# EAGLE board Panel (EAGLE 8.2.1), part 1 of 2
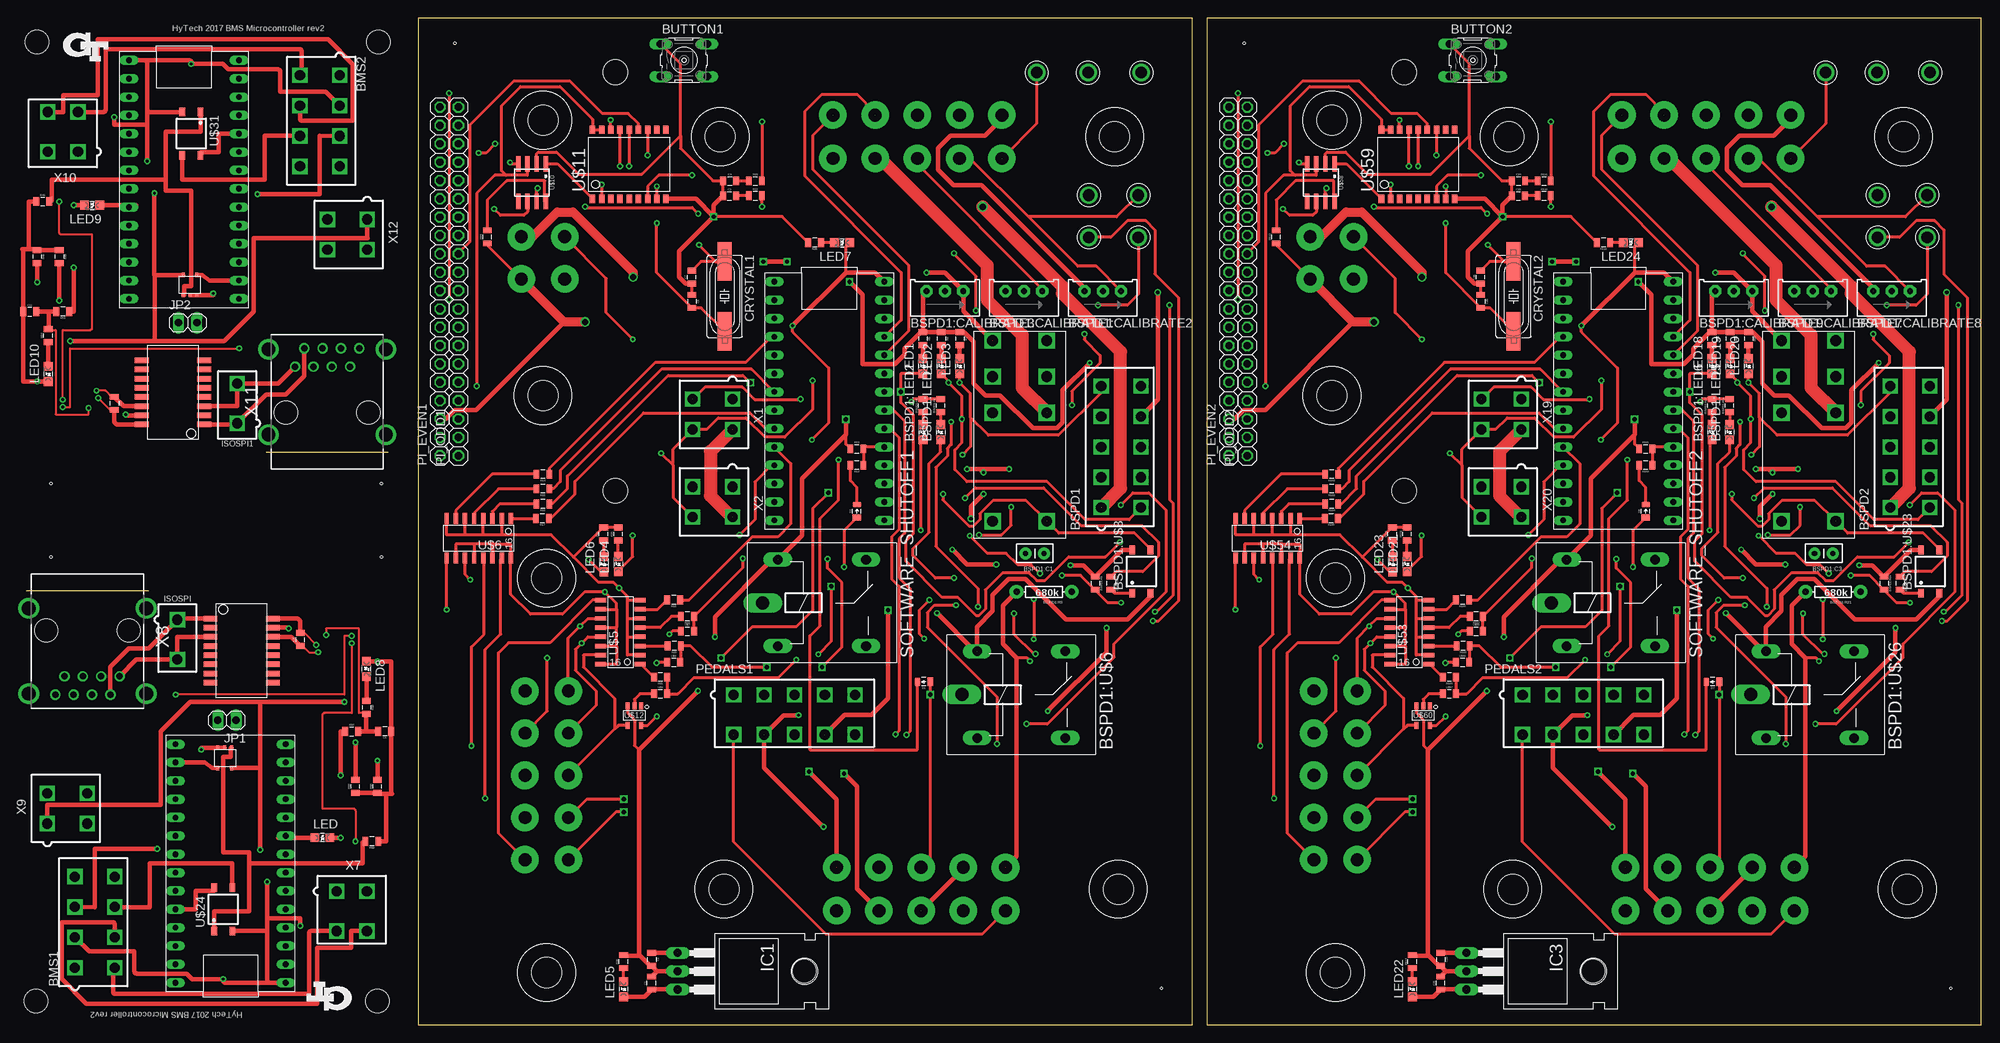
[diagram p0: board, top side]
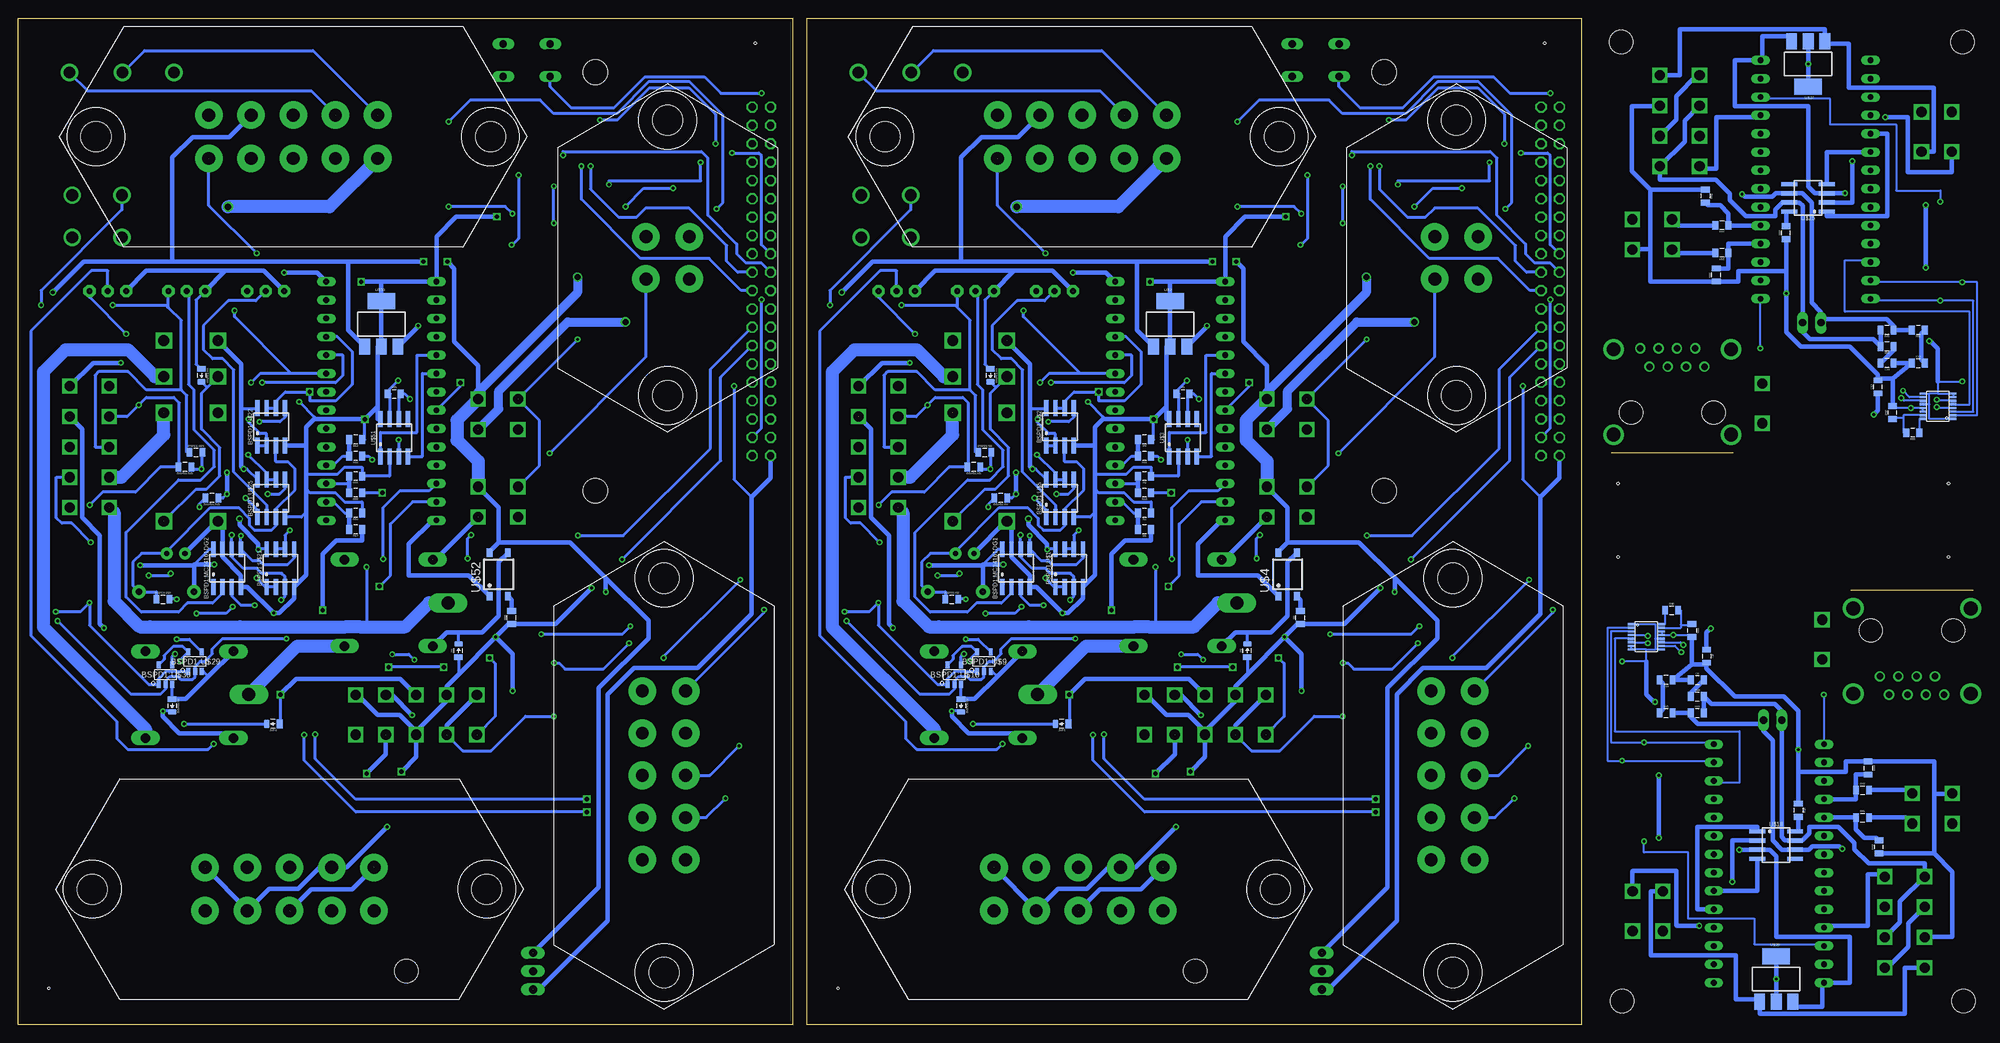
[diagram p1: board, bottom side, seen from below]

Size 270.55 x 139.37 mm. Coordinates in mm from the lower left corner, seen from the top.
Outline: 163.39,0 270.55,0 270.55,139.37 163.39,139.37 163.39,0
Outline: 54.22,0 161.38,0 161.38,139.37 54.22,139.37 54.22,0
Copper layers (1*16): Top 0.035mm / dielectric 1.5mm / Bottom 0.035mm
Design rules "default *": minimum track width 6mil, minimum drill 15mil, track to track 8mil, track to pad 8mil, pad to pad 8mil, via to via 8mil, smd to smd 8mil, copper to edge 40mil, drill to drill 8mil, minimum pad ring 10mil, minimum via ring 8mil, stop-mask expansion 4mil, vias tented up to drill 0mil, thermal gap 10mil
Holes 3.3 mm at 48.58,3.3 1.33,3.3 1.49,136.07 48.73,136.07
Holes 3.43 mm at 190.67,131.88 190.67,73.96 81.5,131.88 81.5,73.96
Holes 0.35 mm at 3.42,74.93 49.14,74.93 49.14,64.77 3.42,64.77 157.09,5.08 266.31,5.08 59.3,135.89 168.52,135.89
tKeepout: area 186.4,69.7 to 194.8,78.1; area 186.5,127.6 to 194.8,136; area 77.3,69.7 to 85.6,78.1; area 77.3,127.6 to 85.7,136

## Footprints (pad centres in the part's own frame; a part is rotated, then mirrored left to right if it is on the bottom)
MINIFIT_5566-8 = drill 1.4 square: 1 6.3,-2.75; 2 2.1,-2.75; 3 -2.1,-2.75; 4 -6.3,-2.75; 5 6.3,2.75; 6 2.1,2.75; 7 -2.1,2.75; 8 -6.3,2.75
MINIFIT_5566-10 = drill 1.4 square: 1 8.4,-2.75; 2 4.2,-2.75; 3 0,-2.75; 4 -4.2,-2.75; 5 -8.4,-2.75; 6 8.4,2.75; 7 4.2,2.75; 8 0,2.75; 9 -4.2,2.75; 10 -8.4,2.75
CAP-PTH-SMALLEZ = drill 0.7 pad 1.651: 1 0,0; 2 2.54,0
TRIMPOT_3296 = drill 0.813 pad 1.676 octagon: 1 2.54,1.27; 2 0,1.27; 3 -2.54,1.27
0805_D = smd 0.8 x 1.2: A -0.9,0; C 0.9,0
LED-805 = smd 1.2 x 1.2: A 0,-1.05; C 0,1.05
SOIC-08 = smd 0.6 x 2.2: 1 -1.905,-2.6; 2 -0.635,-2.6; 3 0.635,-2.6; 4 1.905,-2.6; 5 1.905,2.6; 6 0.635,2.6; 7 -0.635,2.6; 8 -1.905,2.6
0805 = smd 0.8 x 1.2: 1 -0.9,0; 2 0.9,0
AXIAL-0.3EZ = drill 0.9 pad 1.88: P$1 -3.81,0; P$2 3.81,0
SOP04 = smd 0.8 x 1.2: 1 -1.27,-3; 2 1.27,-3; 3 1.27,3; 4 -1.27,3
JW2SN = drill 1.5 square: 2 10.008,0; 3 5.004,0; 4 0,0; 5 0,7.493; 6 5.004,7.493; 7 10.008,7.493; COIL+ 25.019,0; COIL- 25.019,7.493
ZF112 = drill 1.321 long: 1 4.064,14.884; 2 4.064,2.896; O 16.256,14.884; S 16.256,2.896 | drill 1.803 long: P 1.956,8.89
TEST_POINT = drill 1.6: P$1 0,0
SOT-23-5 = smd 1 x 0.55: 1 -1.35,0.95; 2 -1.35,0; 3 -1.35,-0.95; 4 1.35,-0.95; 5 1.35,0.95
B3F-10XX = drill 1.016 long: 1 -3.251,2.261; 2 3.251,2.261; 3 -3.251,-2.261; 4 3.251,-2.261
HC49UP = smd 5.334 x 1.93: 1 -4.826,0; 2 4.826,0
TO-220-H = drill 1.118 long: 1 -2.54,-6.35; 2 0,-6.35; 3 2.54,-6.35 | hole 3.302: 0,11.176
MINIFIT_5566-2 = drill 1.4 square: 1 0,-2.75; 2 0,2.75
1X02 = drill 1.016 long: 1 -1.27,0; 2 1.27,0
1X20 = drill 1.016 octagon: 1 0,0; 2 2.54,0; 3 5.08,0; 4 7.62,0; 5 10.16,0; 6 12.7,0; 7 15.24,0; 8 17.78,0; 9 20.32,0; 10 22.86,0; 11 25.4,0; 12 27.94,0; 13 30.48,0; 14 33.02,0; 15 35.56,0; 16 38.1,0; 17 40.64,0; 18 43.18,0; 19 45.72,0; 20 48.26,0
TEENSY_3.2_SIMPLE = drill 0.8 long: 3.3V 16.51,29.21; A0 16.51,3.81; A1 16.51,6.35; A2 16.51,8.89; A3 16.51,11.43; A4 16.51,13.97; A5 16.51,16.51; A6 16.51,19.05; A7 16.51,21.59; A8 16.51,24.13; A9 16.51,26.67; AGND 16.51,31.75; D0(RX1) 1.27,31.75; D1(TX1) 1.27,29.21; D2 1.27,26.67; D3(CANTX) 1.27,24.13; D4(CANRX) 1.27,21.59; D5 1.27,19.05; D6 1.27,16.51; D7(RX3) 1.27,13.97; D8(TX3) 1.27,11.43; D9(RX2) 1.27,8.89; D10(TX2) 1.27,6.35; D11 1.27,3.81; D12 1.27,1.27; D13 16.51,1.27; GND 1.27,34.29; VIN 16.51,34.29
SOT223 = smd 1.5 x 2.235: 1 -2.3,-3.15; 2 0,-3.15; 3 2.3,-3.15 | smd 3.8 x 2.2: 4 0,3.15
SOIC-16 = smd 0.61 x 1.524: 1 -4.445,-2.794; 2 -3.175,-2.794; 3 -1.905,-2.794; 4 -0.635,-2.794; 5 0.635,-2.794; 6 1.905,-2.794; 7 3.175,-2.794; 8 4.445,-2.794; 9 4.445,2.667; 10 3.175,2.667; 11 1.905,2.667; 12 0.635,2.667; 13 -0.635,2.667; 14 -1.905,2.667; 15 -3.175,2.667; 16 -4.445,2.667
SOIC-18W = smd 0.762 x 1.143: 1 -5.08,-4.788; 2 -3.81,-4.788; 3 -2.54,-4.788; 4 -1.27,-4.788; 5 0,-4.788; 6 1.27,-4.788; 7 2.54,-4.788; 8 3.81,-4.788; 9 5.08,-4.788; 10 5.08,4.788; 11 3.81,4.788; 12 2.54,4.788; 13 1.27,4.788; 14 0,4.788; 15 -1.27,4.788; 16 -2.54,4.788; 17 -3.81,4.788; 18 -5.08,4.788
HX1188NL = smd 1.905 x 0.762: 1 -4.318,4.445; 2 -4.318,3.175; 3 -4.318,1.905; 4 -4.318,0.635; 5 -4.318,-0.635; 6 -4.318,-1.905; 7 -4.318,-3.175; 8 -4.318,-4.445; 9 4.318,-4.445; 10 4.318,-3.175; 11 4.318,-1.905; 12 4.318,-0.635; 13 4.318,0.635; 14 4.318,1.905; 15 4.318,3.175; 16 4.318,4.445
SOT23-5 = smd 0.61 x 0.406: EN -2.794,0; GND -2.794,0.94; VCC 0,1.905; WDI 0,0; WDO -2.794,1.905
MSOP-16 = smd 0.305 x 0.889: 1 -0.1,-0.5; 2 0.4,-0.5; 3 0.9,-0.5; 4 1.4,-0.5; 5 1.9,-0.5; 6 2.4,-0.5; 7 2.9,-0.5; 8 3.4,-0.5; 9 3.4,3.7; 10 2.9,3.7; 11 2.4,3.7; 12 1.9,3.7; 13 1.4,3.7; 14 0.9,3.7; 15 0.4,3.7; 16 -0.1,3.7
MINIFIT_5566-4 = drill 1.4 square: 1 2.1,-2.75; 2 -2.1,-2.75; 3 2.1,2.75; 4 -2.1,2.75
MX150L_VERTICAL-4 = drill 1.778 pad 3.81: 1 -2.921,2.997; 2 2.921,2.997; 3 -2.921,-2.997; 4 2.921,-2.997 | hole 4.191: -19.05,0; 19.05,0
MX150L_VERTICAL-10 = drill 1.778 pad 3.81: 1 -11.684,2.997; 2 -5.842,2.997; 3 0,2.997; 4 5.842,2.997; 5 11.684,2.997; 6 -11.684,-2.997; 7 -5.842,-2.997; 8 0,-2.997; 9 5.842,-2.997; 10 11.684,-2.997 | hole 4.191: -27.292,0; 27.292,0
RJ45-SHIELD1 = drill 0.9 pad 1.4: 1 -4.445,6.35; 2 -3.175,8.89; 3 -1.905,6.35; 4 -0.635,8.89; 5 0.635,6.35; 6 1.905,8.89; 7 3.175,6.35; 8 4.445,8.89 | drill 1.9 pad 2.5: S1 -8.128,-3.048; S2 8.128,-3.048; S3 -8.128,8.76; S4 8.128,8.76 | hole 3.251: -5.715,0; 5.715,0

## Placement (x,y rotation side)
BMS1  [MINIFIT_5566-8]  9.46,14.22 270 top
BMS2  [MINIFIT_5566-8]  40.6,125.15 90 top
BSPD1  MINIFIT_5566-10  [MINIFIT_5566-10]  151.5,80.01 270 top
BSPD1:C1  .47u  [CAP-PTH-SMALLEZ]  140.83,65.28 180 top
BSPD1:C3  .47u  [CAP-PTH-SMALLEZ]  250,65.28 180 top
BSPD1:CALIBRATE1  [TRIMPOT_3296]  138.04,100.33 0 top
BSPD1:CALIBRATE2  [TRIMPOT_3296]  148.96,100.33 0 top
BSPD1:CALIBRATE3  [TRIMPOT_3296]  127.11,100.33 0 top
BSPD1:CALIBRATE7  [TRIMPOT_3296]  247.21,100.33 0 top
BSPD1:CALIBRATE8  [TRIMPOT_3296]  258.13,100.33 0 top
BSPD1:CALIBRATE9  [TRIMPOT_3296]  236.28,100.33 0 top
BSPD1:D1  DIODE0805  [0805_D]  136,89.92 270 bottom
BSPD1:D2  DIODE0805  [0805_D]  140.07,44.2 270 bottom
BSPD1:D5  DIODE0805  [0805_D]  245.17,89.92 270 bottom
BSPD1:D6  DIODE0805  [0805_D]  249.24,44.2 270 bottom
BSPD1:LED1  [LED-805]  126.53,82.04 0 top
BSPD1:LED2  [LED-805]  124.09,82.04 0 top
BSPD1:LED5  [LED-805]  235.7,82.04 0 top
BSPD1:LED6  [LED-805]  233.26,82.04 0 top
BSPD1:MC34161DG1  [SOIC-08]  132.45,63.25 0 bottom
BSPD1:MC34161DG2  [SOIC-08]  241.62,63.25 0 bottom
BSPD1:R1  10k  [0805]  147.89,61.14 270 top
BSPD1:R2  330  [0805]  141.34,58.93 0 bottom
BSPD1:R3  680k  [AXIAL-0.3EZ]  140.83,59.94 180 top
BSPD1:R4  680  [0805]  150.1,61.14 270 top
BSPD1:R5  10k  [0805]  138.29,77.22 180 bottom
BSPD1:R6  10k  [0805]  136.77,79.25 0 bottom
BSPD1:R7  10k  [0805]  134.56,72.92 180 bottom
BSPD1:R8  330  [0805]  126.53,85.72 90 top
BSPD1:R9  330  [0805]  124.09,85.72 90 top
BSPD1:R19  10k  [0805]  257.06,61.14 270 top
BSPD1:R20  330  [0805]  250.51,58.93 0 bottom
BSPD1:R21  680k  [AXIAL-0.3EZ]  250,59.94 180 top
BSPD1:R22  680  [0805]  259.27,61.14 270 top
BSPD1:R23  10k  [0805]  247.46,77.22 180 bottom
BSPD1:R24  10k  [0805]  245.94,79.25 0 bottom
BSPD1:R25  10k  [0805]  243.73,72.92 180 bottom
BSPD1:R26  330  [0805]  235.7,85.72 90 top
BSPD1:R27  330  [0805]  233.26,85.72 90 top
BSPD1:U$1  MCP6002SOIC  [SOIC-08]  125.08,63.25 0 bottom
BSPD1:U$2  MCP6002SOIC  [SOIC-08]  126.35,82.8 0 bottom
BSPD1:U$3  CPC1002N  [SOP04]  154.29,62.74 0 top
BSPD1:U$4  JW2SN-DC5V  [JW2SN]  133.72,94.74 270 top
BSPD1:U$5  MCP6002SOIC  [SOIC-08]  126.35,72.9 0 bottom
BSPD1:U$6  G5LE  [ZF112]  127.5,36.83 0 top
BSPD1:U$7  TEST_POINT  [TEST_POINT]  147.03,114.86 0 top
BSPD1:U$8  TEST_POINT  [TEST_POINT]  147.03,109.02 0 top
BSPD1:U$9  SN74AHC1G09  [SOT-23-5]  136.89,50.29 90 bottom
BSPD1:U$10  SN74LVC1G08  [SOT-23-5]  140.98,48.49 90 bottom
BSPD1:U$21  MCP6002SOIC  [SOIC-08]  234.25,63.25 0 bottom
BSPD1:U$22  MCP6002SOIC  [SOIC-08]  235.52,82.8 0 bottom
BSPD1:U$23  CPC1002N  [SOP04]  263.46,62.74 0 top
BSPD1:U$24  JW2SN-DC5V  [JW2SN]  242.89,94.74 270 top
BSPD1:U$25  MCP6002SOIC  [SOIC-08]  235.52,72.9 0 bottom
BSPD1:U$26  G5LE  [ZF112]  236.66,36.83 0 top
BSPD1:U$27  TEST_POINT  [TEST_POINT]  256.2,114.86 0 top
BSPD1:U$28  TEST_POINT  [TEST_POINT]  256.2,109.02 0 top
BSPD1:U$29  SN74AHC1G09  [SOT-23-5]  246.06,50.29 90 bottom
BSPD1:U$30  SN74LVC1G08  [SOT-23-5]  250.15,48.49 90 bottom
BSPD2  MINIFIT_5566-10  [MINIFIT_5566-10]  260.67,80.01 270 top
BUTTON1  [B3F-10XX]  91,133.53 0 top
BUTTON2  [B3F-10XX]  200.16,133.53 0 top
C1  .1uF  [0805]  86.53,5.79 90 top
C2  .33uF  [0805]  86.53,9.07 270 top
C3  560pF  [0805]  97.29,114.76 0 top
C4  560pF  [0805]  97.32,116.84 0 top
C5  0.1uF  [0805]  49.59,40.64 180 top
C6  22pF  [0805]  92.09,100.15 270 top
C7  22pF  [0805]  92.09,103.5 90 top
C8  27pF  [0805]  36.89,51.05 270 bottom
C9  560pF  [0805]  38.16,47.75 0 bottom
C10  560pF  [0805]  42.48,47.75 180 bottom
C11  0.1uF  [0805]  0.47,98.73 0 top
C12  27pF  [0805]  13.17,88.32 90 bottom
C13  560pF  [0805]  11.9,91.62 180 bottom
C14  560pF  [0805]  7.58,91.62 0 bottom
C21  .1uF  [0805]  195.69,5.79 90 top
C22  .33uF  [0805]  195.69,9.07 270 top
C23  560pF  [0805]  206.46,114.76 0 top
C24  560pF  [0805]  206.49,116.84 0 top
C25  22pF  [0805]  201.26,100.15 270 top
C26  22pF  [0805]  201.26,103.5 90 top
CRYSTAL1  16MHz  [HC49UP]  96.63,100.84 270 top
CRYSTAL2  16MHz  [HC49UP]  205.8,100.84 270 top
D1  DIODE0805  [0805_D]  124.19,47.5 180 top
D2  DIODE0805  [0805_D]  114.92,71.12 90 top
D3  DIODE0805  [0805_D]  100.44,51.82 90 bottom
D7  DIODE0805  [0805_D]  233.36,47.5 180 top
D8  DIODE0805  [0805_D]  224.09,71.12 90 top
D9  DIODE0805  [0805_D]  209.61,51.82 90 bottom
IC1  [TO-220-H]  96.48,7.44 270 top
IC3  [TO-220-H]  205.65,7.44 270 top
ISOSPI  CONNECTOR-2  [MINIFIT_5566-2]  20.89,53.34 180 top
ISOSPI1  CONNECTOR-2  [MINIFIT_5566-2]  29.17,86.03 0 top
JMP1  DIODE0805  [0805_D]  126.1,41.66 180 bottom
JMP2  DIODE0805  [0805_D]  235.27,41.66 180 bottom
JP1  M02  [1X02]  27.75,42.16 180 top
JP2  M02  [1X02]  22.31,97.21 0 top
LED  [LED-805]  40.96,25.91 270 top
LED1  [LED-805]  124.07,91.19 0 top
LED2  [LED-805]  126.61,91.19 0 top
LED3  [LED-805]  129.15,91.19 0 top
LED4  [LED-805]  81.9,63.78 0 top
LED5  [LED-805]  82.64,4.95 0 top
LED6  [LED-805]  79.9,63.75 0 top
LED7  [LED-805]  112.89,108.28 90 top
LED8  [LED-805]  47.05,49.28 180 top
LED9  [LED-805]  9.11,113.46 90 top
LED10  [LED-805]  3.01,90.09 0 top
LED18  [LED-805]  233.24,91.19 0 top
LED19  [LED-805]  235.78,91.19 0 top
LED20  [LED-805]  238.32,91.19 0 top
LED21  [LED-805]  191.07,63.78 0 top
LED22  [LED-805]  191.81,4.95 0 top
LED23  [LED-805]  189.06,63.75 0 top
LED24  [LED-805]  222.06,108.28 90 top
PEDALS1  MINIFIT_5566-10  [MINIFIT_5566-10]  106.29,42.93 180 top
PEDALS2  MINIFIT_5566-10  [MINIFIT_5566-10]  215.46,42.93 180 top
PI_EVEN1  [1X20]  57.24,78.79 90 top
PI_EVEN2  [1X20]  166.41,78.79 90 top
PI_ODD1  [1X20]  59.78,78.79 90 top
PI_ODD2  [1X20]  168.95,78.79 90 top
R1  120  [0805]  109.33,87.38 0 bottom
R2  15k  [0805]  114.67,70.87 180 bottom
R3  15k  [0805]  114.67,75.95 180 bottom
R4  15k  [0805]  114.67,81.03 180 bottom
R5  150  [0805]  124.07,95 270 top
R6  150  [0805]  126.61,95 270 top
R7  150  [0805]  129.15,95 270 top
R8  100  [0805]  93.08,56.39 90 bottom
R9  10k  [0805]  114.67,68.58 180 bottom
R10  10k  [0805]  114.67,73.66 180 bottom
R11  10k  [0805]  114.67,78.74 180 bottom
R12  43k  [0805]  114.92,77.47 180 top
R13  12k  [0805]  114.92,79.76 0 top
R14  270  [0805]  71.46,76.23 180 top
R15  270  [0805]  71.46,74.19 180 top
R16  270  [0805]  71.46,72.11 180 top
R17  270  [0805]  71.41,70.1 180 top
R18  270  [0805]  89.57,58.83 180 top
R19  270  [0805]  91.48,56.54 180 top
R20  270  [0805]  89.65,52.45 180 top
R21  270  [0805]  87.74,48.13 180 top
R22  100  [0805]  100.88,114.78 0 top
R23  100  [0805]  100.88,116.84 0 top
R24  4.7k  [0805]  63.79,109.09 90 top
R25  150  [0805]  81.9,67.94 90 top
R26  150  [0805]  82.64,8.76 90 top
R27  150  [0805]  79.87,67.94 90 top
R28  150  [0805]  109.08,108.28 180 top
R29  120  [0805]  38.16,43.18 0 bottom
R30  2k  [0805]  48.58,33.02 90 top
R31  1k  [0805]  38.93,54.61 270 bottom
R32  2k  [0805]  45.53,33.02 90 top
R33  68  [0805]  47.82,25.4 180 top
R34  100  [0805]  38.16,45.47 0 bottom
R35  100  [0805]  42.48,43.18 0 bottom
R36  1k  [0805]  24.19,29.72 270 bottom
R37  [0805]  45.02,40.64 0 top
R38  [0805]  47.05,43.94 270 top
R39  120  [0805]  37.91,53.34 90 top
R40  1k  [0805]  41.72,57.4 0 bottom
R41  1k  [0805]  15.3,28.7 0 bottom
R42  1k  [0805]  15.3,32.51 0 bottom
R43  2k  [0805]  13.02,24.64 90 bottom
R44  2k  [0805]  14.54,35.56 270 bottom
R45  120  [0805]  11.9,96.19 180 bottom
R46  2k  [0805]  1.49,106.35 270 top
R47  1k  [0805]  11.14,84.76 90 bottom
R48  2k  [0805]  4.53,106.35 270 top
R49  68  [0805]  2.25,113.97 0 top
R50  100  [0805]  11.9,93.9 180 bottom
R51  100  [0805]  7.58,96.19 180 bottom
R52  1k  [0805]  25.87,109.65 90 bottom
R53  [0805]  5.04,98.73 180 top
R54  [0805]  3.01,95.43 90 top
R55  120  [0805]  12.15,86.03 270 top
R56  1k  [0805]  8.34,81.97 180 bottom
R57  1k  [0805]  34.76,110.67 180 bottom
R58  1k  [0805]  34.76,106.86 180 bottom
R59  2k  [0805]  37.05,114.73 270 bottom
R60  2k  [0805]  35.52,103.81 90 bottom
R89  120  [0805]  218.5,87.38 0 bottom
R90  15k  [0805]  223.84,70.87 180 bottom
R91  15k  [0805]  223.84,75.95 180 bottom
R92  15k  [0805]  223.84,81.03 180 bottom
R93  150  [0805]  233.24,95 270 top
R94  150  [0805]  235.78,95 270 top
R95  150  [0805]  238.32,95 270 top
R96  100  [0805]  202.25,56.39 90 bottom
R97  10k  [0805]  223.84,68.58 180 bottom
R98  10k  [0805]  223.84,73.66 180 bottom
R99  10k  [0805]  223.84,78.74 180 bottom
R100  43k  [0805]  224.09,77.47 180 top
R101  12k  [0805]  224.09,79.76 0 top
R102  270  [0805]  180.63,76.23 180 top
R103  270  [0805]  180.63,74.19 180 top
R104  270  [0805]  180.63,72.11 180 top
R105  270  [0805]  180.58,70.1 180 top
R106  270  [0805]  198.74,58.83 180 top
R107  270  [0805]  200.65,56.54 180 top
R108  270  [0805]  198.82,52.45 180 top
R109  270  [0805]  196.91,48.13 180 top
R110  100  [0805]  210.05,114.78 0 top
R111  100  [0805]  210.05,116.84 0 top
R112  4.7k  [0805]  172.96,109.09 90 top
R113  150  [0805]  191.07,67.94 90 top
R114  150  [0805]  191.81,8.76 90 top
R115  150  [0805]  189.04,67.94 90 top
R116  150  [0805]  218.25,108.28 180 top
SOFTWARE_SHUTOFF1  G5LE  [ZF112]  99.94,49.53 0 top
SOFTWARE_SHUTOFF2  G5LE  [ZF112]  209.11,49.53 0 top
U$1  TEENSY_3.2_SIMPLE  [TEENSY_3.2_SIMPLE]  102.22,68.58 0 top
U$2  [SOT223]  111.11,97.03 0 bottom
U$3  MCP2551  [SOIC-08]  109.33,81.28 0 bottom
U$4  CPC1002N  [SOP04]  94.86,62.36 0 bottom
U$5  TLP291-4  [SOIC-16]  82.16,54.36 90 top
U$6  TLP291-4  [SOIC-16]  62.6,67.31 180 top
U$7  JUMPER  [0805]  91.48,54.51 0 top
U$8  JUMPER  [0805]  89.57,50.19 0 top
U$9  JUMPER  [0805]  87.74,45.85 0 top
U$10  MCP2551  [SOIC-08]  69.96,116.59 180 top
U$11  MCP2515SMD  [SOIC-18W]  83.43,119.13 0 top
U$12  SN74LV1T34  [SOT-23-5]  84.14,42.82 270 top
U$13  TEST_POINT  [TEST_POINT]  153.89,114.86 0 top
U$14  TEST_POINT  [TEST_POINT]  153.89,109.02 0 top
U$15  TEST_POINT  [TEST_POINT]  139.81,131.83 0 top
U$16  TEST_POINT  [TEST_POINT]  146.93,131.83 0 top
U$17  TEST_POINT  [TEST_POINT]  154.29,131.83 0 top
U$18  MCP2551  [SOIC-08]  27.24,24.89 270 bottom
U$19  HX1188NLHX1188NL  [HX1188NL]  29.78,51.82 0 top
U$20  [SOT223]  27.24,6.35 0 bottom
U$21  STWD100  [SOT23-5]  26.48,35.56 270 top
U$22  LTC6820  [MSOP-16]  46.8,55.37 270 bottom
U$23  TEENSY_3.2_SIMPLE  [TEENSY_3.2_SIMPLE]  37.15,40.13 180 top
U$24  CPC1002N  [SOP04]  27.24,16 0 top
U$25  MCP2551  [SOIC-08]  22.82,114.48 90 bottom
U$26  HX1188NLHX1188NL  [HX1188NL]  20.28,87.55 180 top
U$27  [SOT223]  22.82,133.02 180 bottom
U$28  STWD100  [SOT23-5]  23.58,103.81 90 top
U$29  LTC6820  [MSOP-16]  3.26,84 90 bottom
U$30  TEENSY_3.2_SIMPLE  [TEENSY_3.2_SIMPLE]  12.92,99.24 0 top
U$31  CPC1002N  [SOP04]  22.82,123.37 180 top
U$49  TEENSY_3.2_SIMPLE  [TEENSY_3.2_SIMPLE]  211.39,68.58 0 top
U$50  [SOT223]  220.28,97.03 0 bottom
U$51  MCP2551  [SOIC-08]  218.5,81.28 0 bottom
U$52  CPC1002N  [SOP04]  204.03,62.36 0 bottom
U$53  TLP291-4  [SOIC-16]  191.33,54.36 90 top
U$54  TLP291-4  [SOIC-16]  171.77,67.31 180 top
U$55  JUMPER  [0805]  200.65,54.51 0 top
U$56  JUMPER  [0805]  198.74,50.19 0 top
U$57  JUMPER  [0805]  196.91,45.85 0 top
U$58  MCP2551  [SOIC-08]  179.13,116.59 180 top
U$59  MCP2515SMD  [SOIC-18W]  192.6,119.13 0 top
U$60  SN74LV1T34  [SOT-23-5]  193.31,42.82 270 top
U$61  TEST_POINT  [TEST_POINT]  263.06,114.86 0 top
U$62  TEST_POINT  [TEST_POINT]  263.06,109.02 0 top
U$63  TEST_POINT  [TEST_POINT]  248.98,131.83 0 top
U$64  TEST_POINT  [TEST_POINT]  256.1,131.83 0 top
U$65  TEST_POINT  [TEST_POINT]  263.46,131.83 0 top
X1  MINIFIT_5566-4  [MINIFIT_5566-4]  94.96,84.51 90 top
X2  MINIFIT_5566-4  [MINIFIT_5566-4]  94.96,72.39 90 top
X3  CONNECTOR-4MX150L_VERTICAL-4  [MX150L_VERTICAL-4]  71.49,106.17 270 bottom
X4  CONNECTOR-10MX150L_VERTICAL-10  [MX150L_VERTICAL-10]  123.81,18.8 0 bottom
X5  CONNECTOR-10MX150L_VERTICAL-10  [MX150L_VERTICAL-10]  123.3,122.94 180 bottom
X6  CONNECTOR-10MX150L_VERTICAL-10  [MX150L_VERTICAL-10]  72,34.54 270 bottom
X7  CONNECTOR-4  [MINIFIT_5566-4]  45.02,15.75 180 top
X8  RJ45-6L21-B  [RJ45-SHIELD1]  8.45,54.61 180 top
X9  CONNECTOR-4  [MINIFIT_5566-4]  5.65,29.97 270 top
X10  CONNECTOR-4  [MINIFIT_5566-4]  5.04,123.62 0 top
X11  RJ45-6L21-B  [RJ45-SHIELD1]  41.62,84.76 0 top
X12  CONNECTOR-4  [MINIFIT_5566-4]  44.41,109.4 90 top
X19  MINIFIT_5566-4  [MINIFIT_5566-4]  204.13,84.51 90 top
X20  MINIFIT_5566-4  [MINIFIT_5566-4]  204.13,72.39 90 top
X21  CONNECTOR-4MX150L_VERTICAL-4  [MX150L_VERTICAL-4]  180.66,106.17 270 bottom
X22  CONNECTOR-10MX150L_VERTICAL-10  [MX150L_VERTICAL-10]  232.98,18.8 0 bottom
X23  CONNECTOR-10MX150L_VERTICAL-10  [MX150L_VERTICAL-10]  232.47,122.94 180 bottom
X24  CONNECTOR-10MX150L_VERTICAL-10  [MX150L_VERTICAL-10]  181.17,34.54 270 bottom

## Library data of the parts
BMS1 BMS2 BSPD1 BSPD2 PEDALS1 PEDALS2 X1 X2 X7 X9 X10 X12 X19 X20 = HyTechDevices; OC_FARNELL: unknown; OC_NEWARK: unknown
BSPD1:C1 BSPD1:C3 BSPD1:CALIBRATE1-BSPD1:CALIBRATE3 BSPD1:CALIBRATE7-BSPD1:CALIBRATE9 BSPD1:D1 BSPD1:D2 BSPD1:D5 BSPD1:D6 BSPD1:LED1 BSPD1:LED2 BSPD1:LED5 BSPD1:LED6 BSPD1:MC34161DG1 BSPD1:MC34161DG2 BSPD1:R1-BSPD1:R9 BSPD1:R19-BSPD1:R27 BSPD1:U$1-BSPD1:U$10 BSPD1:U$21-BSPD1:U$30 C1-C14 C21-C26 D1-D3 D7-D9 IC1 IC3 JMP1 JMP2 JP1 JP2 LED LED1-LED10 LED18-LED24 PI_EVEN1 PI_EVEN2 PI_ODD1 PI_ODD2 R1-R60 R89-R116 SOFTWARE_SHUTOFF1 SOFTWARE_SHUTOFF2 U$1-U$31 U$49-U$65 X3-X6 X21-X24 = HyTechDevices
BUTTON1 BUTTON2 = HyTechDevices; MPN: B3F-1000; OC_FARNELL: 176432; OC_NEWARK: 36M3542
CRYSTAL1 CRYSTAL2 = SparkFun-FreqCtrl
ISOSPI ISOSPI1 = HyTechDevices; OC_FARNELL: 1822072; OC_NEWARK: unknown
X8 X11 = con-tycoelectronics; OC_FARNELL: unknown; OC_NEWARK: unknown

## Nets
12V_SUPPLY: BMS1.1 U$20.1 X7.1
12V_SUPPLY1: BMS2.1 U$27.1 X10.1
+5V1: C5.1 LED8.A R30.1 R32.1 R33.1 U$18.3 U$20.3 U$21.VCC U$22.1 U$22.7 U$22.8 U$22.9 U$22.12 U$23.VIN X9.1
+5V2: C11.1 LED10.A R46.1 R48.1 R49.1 U$25.3 U$27.3 U$28.VCC U$29.1 U$29.7 U$29.8 U$29.9 U$29.12 U$30.VIN X12.1
+5V3: BSPD1:CALIBRATE3.1 BSPD1:MC34161DG1.8 BSPD1:R1.1 BSPD1:R3.P$2 BSPD1:R5.1 BSPD1:R6.2 BSPD1:R7.1 BSPD1:U$1.8 BSPD1:U$2.8 BSPD1:U$3.4 BSPD1:U$4.4 BSPD1:U$5.8 BSPD1:U$9.5 BSPD1:U$10.5 LED7.A PEDALS1.1 PEDALS1.4 PEDALS1.7 U$1.VIN U$2.3 U$3.3 U$12.5 X4.1 X4.4 X4.7
+5V4: BSPD1:CALIBRATE9.1 BSPD1:MC34161DG2.8 BSPD1:R19.1 BSPD1:R21.P$2 BSPD1:R23.1 BSPD1:R24.2 BSPD1:R25.1 BSPD1:U$21.8 BSPD1:U$22.8 BSPD1:U$23.4 BSPD1:U$24.4 BSPD1:U$25.8 BSPD1:U$29.5 BSPD1:U$30.5 LED24.A PEDALS2.1 PEDALS2.4 PEDALS2.7 U$49.VIN U$50.3 U$51.3 U$60.5 X22.1 X22.4 X22.7
+5V/1: C1.1 IC1.3 LED5.A PI_EVEN1.1 U$10.3 U$11.17 U$11.18
+5V/3: C21.1 IC3.3 LED22.A PI_EVEN2.1 U$58.3 U$59.17 U$59.18
+12V1: BSPD1.9 BSPD1:D2.C BSPD1:U$6.2 C2.1 IC1.1 U$2.1 U$4.4 U$5.10 U$5.12 U$5.14 U$5.16 U$6.10 U$6.12 U$6.14 U$6.16 X1.1 X2.1 X3.1 X5.9
+12V2: BSPD1:D6.C BSPD1:U$26.2 BSPD2.9 C22.1 IC3.1 U$50.1 U$52.4 U$53.10 U$53.12 U$53.14 U$53.16 U$54.10 U$54.12 U$54.14 U$54.16 X19.1 X20.1 X21.1 X23.9
BSPD1:N$1: BSPD1:CALIBRATE2.2 BSPD1:MC34161DG1.3
BSPD1:N$2: BSPD1:CALIBRATE1.2 BSPD1:MC34161DG1.2
BSPD1:N$3: BSPD1:R4.1 BSPD1:U$5.1
BSPD1:N$4: BSPD1:C1.1 BSPD1:R2.1 BSPD1:R3.P$1 BSPD1:U$2.3 BSPD1:U$5.3
BSPD1:N$5: BSPD1:CALIBRATE3.2 BSPD1:U$5.2
BSPD1:N$6: BSPD1:D1.C BSPD1:U$3.3 BSPD1:U$4.3 BSPD1:U$4.COIL- BSPD1:U$5.5
BSPD1:N$7: BSPD1:U$2.5 BSPD1:U$10.4
BSPD1:N$8: BSPD1:R2.2 BSPD1:U$9.4
BSPD1:N$9: BSPD1:R4.2 BSPD1:U$3.1
BSPD1:N$10: BSPD1:LED2.A BSPD1:U$1.6 BSPD1:U$1.7
BSPD1:N$11: BSPD1:MC34161DG1.5 BSPD1:R1.2 BSPD1:U$1.5 BSPD1:U$7.P$1 BSPD1:U$9.1 BSPD1:U$10.1
BSPD1:N$12: BSPD1:MC34161DG1.6 BSPD1:R7.2 BSPD1:U$1.3 BSPD1:U$8.P$1 BSPD1:U$9.2 BSPD1:U$10.2
BSPD1:N$13: BSPD1:LED1.A BSPD1:U$1.1 BSPD1:U$1.2
BSPD1:N$14: BSPD1:LED2.C BSPD1:R9.1
BSPD1:N$15: BSPD1:LED1.C BSPD1:R8.1
BSPD1:N$31: BSPD1:CALIBRATE8.2 BSPD1:MC34161DG2.3
BSPD1:N$32: BSPD1:CALIBRATE7.2 BSPD1:MC34161DG2.2
BSPD1:N$33: BSPD1:R22.1 BSPD1:U$25.1
BSPD1:N$34: BSPD1:C3.1 BSPD1:R20.1 BSPD1:R21.P$1 BSPD1:U$22.3 BSPD1:U$25.3
BSPD1:N$35: BSPD1:CALIBRATE9.2 BSPD1:U$25.2
BSPD1:N$36: BSPD1:D5.C BSPD1:U$23.3 BSPD1:U$24.3 BSPD1:U$24.COIL- BSPD1:U$25.5
BSPD1:N$37: BSPD1:U$22.5 BSPD1:U$30.4
BSPD1:N$38: BSPD1:R20.2 BSPD1:U$29.4
BSPD1:N$39: BSPD1:R22.2 BSPD1:U$23.1
BSPD1:N$40: BSPD1:LED6.A BSPD1:U$21.6 BSPD1:U$21.7
BSPD1:N$41: BSPD1:MC34161DG2.5 BSPD1:R19.2 BSPD1:U$21.5 BSPD1:U$27.P$1 BSPD1:U$29.1 BSPD1:U$30.1
BSPD1:N$42: BSPD1:MC34161DG2.6 BSPD1:R25.2 BSPD1:U$21.3 BSPD1:U$28.P$1 BSPD1:U$29.2 BSPD1:U$30.2
BSPD1:N$43: BSPD1:LED5.A BSPD1:U$21.1 BSPD1:U$21.2
BSPD1:N$44: BSPD1:LED6.C BSPD1:R27.1
BSPD1:N$45: BSPD1:LED5.C BSPD1:R26.1
BSPD1:SHUTDOWN_C1: BSPD1:U$4.6 BSPD1:U$6.S
BSPD1:SHUTDOWN_C2: BSPD1:U$24.6 BSPD1:U$26.S
BUT1: BUTTON1.3 PI_ODD1.2
BUT2: BUTTON2.3 PI_ODD2.2
CAN-H1: R22.2 U$10.7
CAN-H2: R110.2 U$58.7
CAN-L1: R23.2 U$10.6
CAN-L2: R111.2 U$58.6
CANH: BMS1.4 BMS1.6 JP1.2 R29.2 R34.2 U$18.7 X7.4
CANH1: BMS2.4 BMS2.6 JP2.2 R45.2 R50.2 U$25.7 X10.4
CANL: BMS1.3 BMS1.5 JP1.1 R29.1 R35.2 U$18.6 X7.3
CANL1: BMS2.3 BMS2.5 JP2.1 R45.1 R51.2 U$25.6 X10.3
CS1: PI_EVEN1.12 U$11.16
CS2: PI_EVEN2.12 U$59.16
GND1: BMS1.2 C5.2 C8.2 C9.1 C10.1 R31.2 R36.1 R37.2 R38.2 R43.1 R44.1 U$18.2 U$20.2 U$20.4 U$21.EN U$21.GND U$22.13 U$22.14 U$23.GND U$24.2 X7.2 X9.2
GND2: BMS2.2 C11.2 C12.2 C13.1 C14.1 R47.2 R52.1 R53.2 R54.2 R59.1 R60.1 U$25.2 U$27.2 U$27.4 U$28.EN U$28.GND U$29.13 U$29.14 U$30.GND U$31.2 X10.2 X12.2
GND3: BSPD1.10 BSPD1:C1.2 BSPD1:CALIBRATE1.3 BSPD1:CALIBRATE2.3 BSPD1:CALIBRATE3.3 BSPD1:D1.A BSPD1:D2.A BSPD1:MC34161DG1.4 BSPD1:MC34161DG1.7 BSPD1:R8.2 BSPD1:R9.2 BSPD1:U$1.4 BSPD1:U$2.4 BSPD1:U$3.2 BSPD1:U$4.COIL+ BSPD1:U$5.4 BSPD1:U$6.1 BSPD1:U$9.3 BSPD1:U$10.3 BUTTON1.1 C1.2 C2.2 C3.1 C4.1 C6.1 C7.1 D3.A IC1.2 PEDALS1.2 PEDALS1.5 PEDALS1.8 PI_EVEN1.3 R2.1 R3.1 R4.1 R5.1 R6.1 R7.1 R8.1 R13.1 R24.1 R25.2 R26.2 R27.2 R28.2 SOFTWARE_SHUTOFF1.1 U$1.GND U$2.2 U$2.4 U$3.2 U$3.8 U$5.2 U$5.4 U$5.6 U$5.8 U$6.2 U$6.4 U$6.6 U$6.8 U$10.2 U$11.9 U$12.3 X1.2 X2.2 X3.2 X4.2 X4.5 X4.8 X5.10
GND4: BSPD1:C3.2 BSPD1:CALIBRATE7.3 BSPD1:CALIBRATE8.3 BSPD1:CALIBRATE9.3 BSPD1:D5.A BSPD1:D6.A BSPD1:MC34161DG2.4 BSPD1:MC34161DG2.7 BSPD1:R26.2 BSPD1:R27.2 BSPD1:U$21.4 BSPD1:U$22.4 BSPD1:U$23.2 BSPD1:U$24.COIL+ BSPD1:U$25.4 BSPD1:U$26.1 BSPD1:U$29.3 BSPD1:U$30.3 BSPD2.10 BUTTON2.1 C21.2 C22.2 C23.1 C24.1 C25.1 C26.1 D9.A IC3.2 PEDALS2.2 PEDALS2.5 PEDALS2.8 PI_EVEN2.3 R90.1 R91.1 R92.1 R93.1 R94.1 R95.1 R96.1 R101.1 R112.1 R113.2 R114.2 R115.2 R116.2 SOFTWARE_SHUTOFF2.1 U$49.GND U$50.2 U$50.4 U$51.2 U$51.8 U$53.2 U$53.4 U$53.6 U$53.8 U$54.2 U$54.4 U$54.6 U$54.8 U$58.2 U$59.9 U$60.3 X19.2 X20.2 X21.2 X22.2 X22.5 X22.8 X23.10
INT1: PI_EVEN1.11 U$11.12
INT2: PI_EVEN2.11 U$59.12
ISOSPI-M: ISOSPI.2 U$19.3 X8.1
ISOSPI-M1: ISOSPI1.2 U$26.3 X11.1
ISOSPI-P: ISOSPI.1 U$19.1 X8.2
ISOSPI-P1: ISOSPI1.1 U$26.1 X11.2
LED1: LED6.A PI_ODD1.7
LED2: LED4.A PI_ODD1.8
LED5: LED23.A PI_ODD2.7
LED6: LED21.A PI_ODD2.8
MISO1: R32.2 U$22.3 U$23.D12
MISO2: R48.2 U$29.3 U$30.D12
MISO3: PI_ODD1.11 U$11.15
MISO4: PI_ODD2.11 U$59.15
MOSI1: R30.2 U$22.2 U$23.D11
MOSI2: R46.2 U$29.2 U$30.D11
MOSI3: PI_ODD1.10 U$11.14
MOSI4: PI_ODD2.10 U$59.14
N$2: R1.2 U$3.6 X1.3 X2.3 X3.3
N$4: R1.1 U$3.7 X1.4 X2.4 X3.4
N$5: U$1.D4(CANRX) U$3.4
N$6: U$1.D3(CANTX) U$3.1
N$7: PEDALS1.6 R10.1 X4.6
N$8: R2.2 R9.2 U$1.A0
N$9: LED1.C R5.2
N$10: LED2.C R6.2
N$11: LED3.C R7.2
N$12: R8.2 U$4.2
N$13: R3.2 R10.2 U$1.A1
N$14: PEDALS1.9 R9.1 X4.9
N$15: R4.2 R11.2 U$1.A2
N$16: D1.A JMP1.A PEDALS1.3 X4.3
N$17: D1.C R11.1
N$18: D3.C SOFTWARE_SHUTOFF1.2 U$4.3
N$19: D2.C R12.2
N$20: R14.1 U$1.D2
N$21: R15.1 U$1.D5
N$22: R16.1 U$1.D6
N$23: R17.1 U$1.D7(RX3)
N$24: R19.1 U$1.D9(RX2) U$7.2
N$25: U$6.9 X6.1
N$26: U$6.11 X6.2
N$27: U$6.13 X6.3
N$28: U$6.15 X6.4
N$29: U$5.9 X6.5
N$30: U$5.11 U$7.1 X6.6
N$31: R14.2 U$6.7
N$32: R15.2 U$6.5
N$33: R16.2 U$6.3
N$34: R17.2 U$6.1
N$35: R18.1 U$1.D8(TX3)
N$36: R18.2 U$5.7
N$37: R19.2 U$5.5
N$38: R20.1 U$1.D10(TX2) U$8.2
N$39: R21.1 U$1.D11 U$9.2
N$40: U$1.A5 X6.10
N$41: U$1.A4 X6.9
N$42: R20.2 U$5.3
N$43: R21.2 U$5.1
N$44: U$5.13 U$8.1 X6.7
N$45: U$5.15 U$12.4 X6.8
N$46: U$10.1 U$11.1
N$47: U$10.4 U$11.2
N$48: C6.2 CRYSTAL1.2 U$11.8
N$49: R24.2 U$10.8
N$50: C7.2 CRYSTAL1.1 U$11.7
N$51: C3.2 R22.1
N$52: C4.2 R23.1
N$53: LED4.C R25.1
N$54: LED5.C R26.1
N$61: LED6.C R27.1
N$62: U$18.1 U$23.D3(CANTX)
N$63: R36.2 U$18.8
N$64: C9.2 R34.1
N$65: C10.2 R35.1
N$66: LED.C R37.1
N$67: LED8.C R38.1
N$68: R40.1 U$22.16
N$69: R31.1 R40.2 U$22.15
N$70: R39.1 U$19.14 U$22.10
N$71: R39.2 U$19.16 U$22.11
N$72: C8.1 U$19.15
N$73: U$18.4 U$23.D4(CANRX)
N$74: LED.A U$23.D7(RX3)
N$75: R33.2 U$21.WDO U$24.1
N$76: BMS1.7 U$24.3
N$77: U$23.A8 U$24.4
N$78: BMS1.8 U$23.A9
N$79: R41.2 X9.3
N$80: R41.1 R43.2 U$23.A3
N$81: R42.2 X9.4
N$82: R42.1 R44.2 U$23.A2
N$83: U$21.WDI U$23.A0
N$84: U$22.6 U$23.3.3V
N$85: U$22.5 U$23.D10(TX2)
N$86: U$25.1 U$30.D3(CANTX)
N$87: R52.2 U$25.8
N$88: C13.2 R50.1
N$89: C14.2 R51.1
N$90: LED9.C R53.1
N$91: LED10.C R54.1
N$92: R56.1 U$29.16
N$93: R47.1 R56.2 U$29.15
N$94: R55.1 U$26.14 U$29.10
N$95: R55.2 U$26.16 U$29.11
N$96: C12.1 U$26.15
N$97: U$25.4 U$30.D4(CANRX)
N$98: LED9.A U$30.D7(RX3)
N$99: R49.2 U$28.WDO U$31.1
N$100: BMS2.7 U$31.3
N$101: U$30.A8 U$31.4
N$102: BMS2.8 U$30.A9
N$103: R57.2 X12.3
N$104: R57.1 R59.2 U$30.A3
N$105: R58.2 X12.4
N$106: R58.1 R60.2 U$30.A2
N$107: U$28.WDI U$30.A0
N$108: U$29.6 U$30.3.3V
N$109: U$29.5 U$30.D10(TX2)
N$110: U$9.1 U$12.2
N$112: LED7.C R28.1
N$166: R89.2 U$51.6 X19.3 X20.3 X21.3
N$167: R89.1 U$51.7 X19.4 X20.4 X21.4
N$168: U$49.D4(CANRX) U$51.4
N$169: U$49.D3(CANTX) U$51.1
N$170: PEDALS2.6 R98.1 X22.6
N$171: R90.2 R97.2 U$49.A0
N$172: LED18.C R93.2
N$173: LED19.C R94.2
N$174: LED20.C R95.2
N$175: R96.2 U$52.2
N$176: R91.2 R98.2 U$49.A1
N$177: PEDALS2.9 R97.1 X22.9
N$178: R92.2 R99.2 U$49.A2
N$179: D7.A JMP2.A PEDALS2.3 X22.3
N$180: D7.C R99.1
N$181: D9.C SOFTWARE_SHUTOFF2.2 U$52.3
N$182: D8.C R100.2
N$183: R102.1 U$49.D2
N$184: R103.1 U$49.D5
N$185: R104.1 U$49.D6
N$186: R105.1 U$49.D7(RX3)
N$187: R107.1 U$49.D9(RX2) U$55.2
N$188: U$54.9 X24.1
N$189: U$54.11 X24.2
N$190: U$54.13 X24.3
N$191: U$54.15 X24.4
N$192: U$53.9 X24.5
N$193: U$53.11 U$55.1 X24.6
N$194: R102.2 U$54.7
N$195: R103.2 U$54.5
N$196: R104.2 U$54.3
N$197: R105.2 U$54.1
N$198: R106.1 U$49.D8(TX3)
N$199: R106.2 U$53.7
N$200: R107.2 U$53.5
N$201: R108.1 U$49.D10(TX2) U$56.2
N$202: R109.1 U$49.D11 U$57.2
N$203: U$49.A5 X24.10
N$204: U$49.A4 X24.9
N$205: R108.2 U$53.3
N$206: R109.2 U$53.1
N$207: U$53.13 U$56.1 X24.7
N$208: U$53.15 U$60.4 X24.8
N$209: U$58.1 U$59.1
N$210: U$58.4 U$59.2
N$211: C25.2 CRYSTAL2.2 U$59.8
N$212: R112.2 U$58.8
N$213: C26.2 CRYSTAL2.1 U$59.7
N$214: C23.2 R110.1
N$215: C24.2 R111.1
N$216: LED21.C R113.1
N$217: LED22.C R114.1
N$218: LED23.C R115.1
N$219: U$57.1 U$60.2
N$220: LED24.C R116.1
READ_CHARGE1: BSPD1.6 BSPD1:U$2.1 BSPD1:U$2.2 LED2.A U$1.A8 U$16.P$1 X5.6
READ_CHARGE2: BSPD1:U$22.1 BSPD1:U$22.2 BSPD2.6 LED19.A U$49.A8 U$64.P$1 X23.6
READ_FAULT1: BSPD1.5 BSPD1:U$5.6 BSPD1:U$5.7 LED3.A U$1.A7 U$15.P$1 X5.5
READ_FAULT2: BSPD1:U$25.6 BSPD1:U$25.7 BSPD2.5 LED20.A U$49.A7 U$63.P$1 X23.5
READ_SWITCH1: BSPD1.7 BSPD1:U$2.6 BSPD1:U$2.7 LED1.A U$1.A9 U$17.P$1 X5.7
READ_SWITCH2: BSPD1:U$22.6 BSPD1:U$22.7 BSPD2.7 LED18.A U$49.A9 U$65.P$1 X23.7
READ_UPSTREAM_SHUTDOWN1: R12.1 R13.2 U$1.A3
READ_UPSTREAM_SHUTDOWN2: R100.1 R101.2 U$49.A3
SCK1: U$22.4 U$23.D13
SCK2: U$29.4 U$30.D13
SCK3: PI_ODD1.12 U$11.13
SCK4: PI_ODD2.12 U$59.13
SHUTDOWN_A1: BSPD1.1 D2.A SOFTWARE_SHUTOFF1.P X5.1
SHUTDOWN_A2: BSPD2.1 D8.A SOFTWARE_SHUTOFF2.P X23.1
SHUTDOWN_B1: BSPD1:U$6.P SOFTWARE_SHUTOFF1.S
SHUTDOWN_B2: BSPD1:U$26.P SOFTWARE_SHUTOFF2.S
SHUTDOWN_D1: BSPD1.2 BSPD1:U$4.7 X5.2
SHUTDOWN_D2: BSPD1:U$24.7 BSPD2.2 X23.2
SHUTDOWN_RELAY_CTRL1: U$1.D12 U$4.1
SHUTDOWN_RELAY_CTRL2: U$49.D12 U$52.1
SIGNAL_BRAKE1: BSPD1.4 BSPD1:CALIBRATE2.1 BSPD1:R5.2 JMP1.C U$13.P$1 X5.4
SIGNAL_BRAKE2: BSPD1:CALIBRATE8.1 BSPD1:R23.2 BSPD2.4 JMP2.C U$61.P$1 X23.4
SIGNAL_CURRENT1: BSPD1.3 BSPD1:CALIBRATE1.1 BSPD1:R6.1 U$14.P$1 X5.3
SIGNAL_CURRENT2: BSPD1:CALIBRATE7.1 BSPD1:R24.1 BSPD2.3 U$62.P$1 X23.3

## Tracks (layer width: path | path; a pad name or v marks a point on that pad's centre or on a via)
12V_SUPPLY
  Bottom 0.61: BMS1.1 9.46,7.92 9.46,1.52 29.54,1.52 U$20.1 29.27,3.2 29.27,3.56 32.83,3.56 32.83,9.65 44.62,9.65 44.62,18.5 X7.1
12V_SUPPLY1
  Bottom 0.61: BMS2.1 40.6,131.45 40.6,137.85 20.52,137.85 U$27.1 20.79,136.17 20.79,135.81 17.23,135.81 17.23,129.72 5.45,129.72 5.45,120.87 X10.1
+5V1  (via drill 0.4)
  Top 0.61: 49.76,32 50.61,32 arc-90 50.49,32.12 C5.1 50.49,50.33 48.61,50.33 arc90 v48.58,50.29 | 49.76,32 48.58,32 R30.1 R32.1 | R33.1 49.76,25.4 49.76,32 | 32.32,44.7 22.67,44.7 18.61,40.64 18.61,30.48 2.9,30.48 | 32.32,44.7 v44.01,44.7 | 32.32,35.56 U$21.VCC | v48.58,50.29 48.64,50.29 | LED8.A 48.54,50.33 arc-90 v48.58,50.29 | 2.86,30.48 2.9,30.48 | 2.9,30.48 X9.1 | v32.35,24.23 32.35,35.56 32.32,35.56 | 32.32,35.56 32.32,44.7
  Bottom 0.305: 44.01,53.47 U$22.12 | 44.01,53.47 44.01,51.97 | U$22.1 44.01,55.47 44.01,53.47 | v48.58,50.29 45.2,50.29 45.2,51.97 | U$22.7 U$22.8 45.2,51.97 | U$18.3 30.48,24.26 30.48,24.37 | U$22.9 44.01,51.97 | 45.2,51.97 44.01,51.97
  Bottom 0.61: U$20.3 24.94,2.54 20.89,2.54 20.89,5.84 U$23.VIN 17.08,5.84 17.08,12.19 27.24,12.19 27.24,23.37 28.13,24.26 U$18.3 32.35,24.26 | 32.4,24.26 32.35,24.26 | 32.35,24.26 v32.35,24.23 | v44.01,44.7 44.16,44.7 45.2,45.74 45.2,50.29
+5V2  (via drill 0.4)
  Top 0.61: 0.31,107.37 -0.55,107.37 arc-90 -0.43,107.25 C11.1 -0.43,89.04 1.45,89.04 arc90 v1.49,89.08 | 0.31,107.37 1.49,107.37 R46.1 R48.1 | R49.1 0.31,113.97 0.31,107.37 | 17.74,94.67 27.39,94.67 31.46,98.73 31.46,108.89 47.16,108.89 | 17.74,94.67 v6.06,94.67 | 17.74,103.81 U$28.VCC | v1.49,89.08 1.42,89.08 | LED10.A 1.52,89.04 arc-90 v1.49,89.08 | 47.21,108.89 47.16,108.89 | 47.16,108.89 X12.1 | v17.72,115.14 17.72,103.81 17.74,103.81 | 17.74,103.81 17.74,94.67
  Bottom 0.305: 6.06,85.9 U$29.12 | 6.06,85.9 6.06,87.4 | U$29.1 6.06,83.9 6.06,85.9 | v1.49,89.08 4.86,89.08 4.86,87.4 | U$29.7 U$29.8 4.86,87.4 | U$25.3 19.58,115.11 19.58,115 | U$29.9 6.06,87.4 | 4.86,87.4 6.06,87.4
  Bottom 0.61: U$27.3 25.12,136.83 29.17,136.83 29.17,133.53 U$30.VIN 32.98,133.53 32.98,127.18 22.82,127.18 22.82,116 21.93,115.11 U$25.3 17.72,115.11 | 17.67,115.11 17.72,115.11 | 17.72,115.11 v17.72,115.14 | v6.06,94.67 5.91,94.67 4.86,93.62 4.86,89.08
+5V3  (via drill 0.4, 0.45, 0.5)
  Top 0.406: X4.1 135.5,21.84 | v106.03,96.77 106.03,95.91 111.01,90.93 111.01,83.31 v108.7,81 | U$12.5 85.99,41.47 v87.24,42.72 | 113.4,104.14 113.4,107.74 LED7.A | v138.9,50.34 138.44,50.8 137.02,50.8
  Top 0.61: v110.3,27.43 110.25,27.43 102.09,35.59 PEDALS1.7 104.79,42.88 v106.85,42.88 | v144.5,63.63 146.3,63.63 BSPD1:R1.1 151.59,65.74 BSPD1:U$3.4 | v132.47,76.48 131.99,76.96 | 131.99,76.96 v130.16,76.96 | 131.99,76.96 v136,76.96 | v106.03,96.77 113.4,104.14 117.46,104.14 U$1.VIN | v124.57,104.14 127.11,104.14 BSPD1:CALIBRATE3.1 129.65,98.81 BSPD1:U$4.4 | X4.1 137.02,23.32 137.02,50.8 135.12,52.7 135.12,58.04 BSPD1:R3.P$2 | v134.23,63.73 130.19,63.73 v128.13,65.79 | v130.72,70.08 130.72,71.73 v132.47,73.48
  Bottom 0.406: BSPD1:U$2.8 128.32,85.34 130.49,85.34 | v130.16,76.96 129.72,76.96 BSPD1:U$5.8 128.38,75.5 | BSPD1:R5.1 137.39,76.96 v136,76.96 136,79.25 BSPD1:R6.2 | BSPD1:U$1.8 128.13,65.85 v128.13,65.79 | BSPD1:MC34161DG1.8 134.35,65.79 134.96,65.79 137.02,63.73 | 137.02,59.69 BSPD1:R3.P$2 | v108.7,81 U$3.3 | PEDALS1.7 99.86,37.95 95.95,37.95 91.17,42.72 v87.24,42.72 | BSPD1:R7.1 133.03,72.92 v132.47,73.48 | v138.9,50.34 138.9,50.59 BSPD1:U$9.5 138.58,52.38 139.92,52.38 141.18,51.11 141.18,50.59 BSPD1:U$10.5
  Bottom 0.61: PEDALS1.7 102.09,41.48 PEDALS1.1 | 137.02,63.73 BSPD1:R3.P$2 | v110.3,27.43 115.94,21.79 X4.4 119.62,21.79 122.59,18.82 126.63,18.82 X4.7 129.65,15.95 X4.1 | PEDALS1.4 109.65,45.68 v106.85,42.88 | 137.02,63.73 137.12,63.63 v144.5,63.63 | v132.47,73.48 v132.47,76.48 | U$2.3 106.03,96.66 v106.03,96.77 | U$1.VIN 120,104.14 v124.57,104.14 | v130.16,76.96 130.49,77.29 130.49,85.34 130.49,91.44 133.72,94.67 BSPD1:U$4.4 | 137.02,63.73 v134.23,63.73 | v130.72,70.08 130.72,69.19 128.13,66.6 v128.13,65.79
+5V4  (via drill 0.4, 0.45, 0.5)
  Top 0.406: X22.1 244.67,21.84 | v215.2,96.77 215.2,95.91 220.18,90.93 220.18,83.31 v217.87,81 | U$60.5 195.16,41.47 v196.41,42.72 | 222.57,104.14 222.57,107.74 LED24.A | v248.07,50.34 247.61,50.8 246.19,50.8
  Top 0.61: v219.47,27.43 219.42,27.43 211.26,35.59 PEDALS2.7 213.95,42.88 v216.01,42.88 | v253.67,63.63 255.47,63.63 BSPD1:R19.1 260.76,65.74 BSPD1:U$23.4 | v241.64,76.48 241.15,76.96 | 241.15,76.96 v239.33,76.96 | 241.15,76.96 v245.17,76.96 | v215.2,96.77 222.57,104.14 226.63,104.14 U$49.VIN | v233.74,104.14 236.28,104.14 BSPD1:CALIBRATE9.1 238.82,98.81 BSPD1:U$24.4 | X22.1 246.19,23.32 246.19,50.8 244.28,52.7 244.28,58.04 BSPD1:R21.P$2 | v243.4,63.73 239.36,63.73 v237.3,65.79 | v239.89,70.08 239.89,71.73 v241.64,73.48
  Bottom 0.406: BSPD1:U$22.8 237.49,85.34 239.66,85.34 | v239.33,76.96 238.89,76.96 BSPD1:U$25.8 237.55,75.5 | BSPD1:R23.1 246.56,76.96 v245.17,76.96 245.17,79.25 BSPD1:R24.2 | BSPD1:U$21.8 237.3,65.85 v237.3,65.79 | BSPD1:MC34161DG2.8 243.52,65.79 244.13,65.79 246.19,63.73 | 246.19,59.69 BSPD1:R21.P$2 | v217.87,81 U$51.3 | PEDALS2.7 209.03,37.95 205.12,37.95 200.34,42.72 v196.41,42.72 | BSPD1:R25.1 242.2,72.92 v241.64,73.48 | v248.07,50.34 248.07,50.59 BSPD1:U$29.5 247.75,52.38 249.09,52.38 250.35,51.11 250.35,50.59 BSPD1:U$30.5
  Bottom 0.61: PEDALS2.7 211.26,41.48 PEDALS2.1 | 246.19,63.73 BSPD1:R21.P$2 | v219.47,27.43 225.11,21.79 X22.4 228.79,21.79 231.76,18.82 235.8,18.82 X22.7 238.82,15.95 X22.1 | PEDALS2.4 218.82,45.68 v216.01,42.88 | 246.19,63.73 246.29,63.63 v253.67,63.63 | v241.64,73.48 v241.64,76.48 | U$50.3 215.2,96.66 v215.2,96.77 | U$49.VIN 229.17,104.14 v233.74,104.14 | v239.33,76.96 239.66,77.29 239.66,85.34 239.66,91.44 242.89,94.67 BSPD1:U$24.4 | 246.19,63.73 v243.4,63.73 | v239.89,70.08 239.89,69.19 237.3,66.6 v237.3,65.79
+5V/1  (via drill 0.4)
  Top 0.406: 78.31,123.95 U$11.18 | U$11.18 U$11.17 | U$10.3 69.33,117.6 66.38,117.6 | U$11.18 78.35,125.35 73.82,129.87 68.39,129.87 65.75,127.23 65.75,118.24 66.38,117.6 | 66.38,117.6 64.81,117.6 62.32,115.11 v62.32,88.44
  Top 0.61: IC1.3 86.54,4.9 C1.1 85.54,3.9 LED5.A
  Bottom 0.406: v62.32,88.44 62.32,75.51 59.88,73.08
  Bottom 0.61: IC1.3 89.24,4.9 79.77,14.38 79.77,45.77 76.14,49.4 67.37,49.4 59.88,56.9 59.88,73.08 57.24,75.72 PI_EVEN1.1
+5V/3  (via drill 0.4)
  Top 0.406: 187.48,123.95 U$59.18 | U$59.18 U$59.17 | U$58.3 178.5,117.6 175.55,117.6 | U$59.18 187.52,125.35 182.99,129.87 177.56,129.87 174.92,127.23 174.92,118.24 175.55,117.6 | 175.55,117.6 173.98,117.6 171.49,115.11 v171.49,88.44
  Top 0.61: IC3.3 195.71,4.9 C21.1 194.71,3.9 LED22.A
  Bottom 0.406: v171.49,88.44 171.49,75.51 169.05,73.08
  Bottom 0.61: IC3.3 198.41,4.9 188.94,14.38 188.94,45.77 185.31,49.4 176.54,49.4 169.05,56.9 169.05,73.08 166.41,75.72 PI_EVEN2.1
+12V1  (via drill 0.4, 0.5, 0.6, 0.85)
  Top 0.406: 64.63,66.55 64.5,66.42 U$6.14 | 64.63,66.55 61.96,66.55 | U$5.12 81.65,54.99 | U$5.14 81.65,52.45 | 81.65,52.45 81.65,49.91 U$5.16 | 64.63,66.55 67.04,66.55 U$6.16 67.04,59.59 69.75,56.88 74.19,56.88 77.25,59.94 v80.05,59.94 81.65,58.34 81.65,57.58 | 61.96,66.55 U$6.12 | U$6.10 59.42,66.55 61.96,66.55 | 81.65,52.45 81.65,54.99 | 81.65,57.58 81.65,54.99 | U$5.10 81.6,57.53 81.65,57.58
  Top 0.61: v105.27,105.66 v101.97,105.66 | BSPD1.9 156.58,86.54 v156.58,101.4 | v149.49,54.97 149.49,51.59 v141.34,43.43 | IC1.1 86.54,9.98 C2.1
  Top 1.27: X3.1 70.04,109.09 73.47,112.52 75.63,112.52 83.96,104.19 v83.96,103.53
  Bottom 0.406: v141.34,43.43 140.07,43.43 BSPD1:D2.C
  Bottom 0.61: v105.27,105.66 115.68,105.66 | 115.68,105.66 115.68,96.15 U$2.1 | X1.1 97.71,91.27 101,94.56 101,104.7 v101.97,105.66 | 115.68,105.66 140.07,105.66 | X5.9 132.17,122.91 137.25,122.91 140.07,120.09 140.07,105.66 | BSPD1.9 152.51,82.48 152.51,70.23 150.05,67.77 150.05,55.52 v149.49,54.97 | v141.34,43.43 141.34,42.67 139.05,40.39 132.22,40.39 BSPD1:U$6.2 | X2.1 94.86,71.64 94.86,66.8 | 94.86,66.8 96.13,65.53 U$4.4 | 80.05,61.85 v80.05,59.94 | IC1.1 81.04,19.07 81.04,46.63 74.16,53.52 74.16,55.96 80.05,61.85 | v156.58,101.4 152.31,105.66 140.07,105.66 | 80.05,61.85 85,66.8 94.86,66.8
  Bottom 1.27: v83.96,103.53 83.96,101.37 97.71,87.62 X1.1
  Bottom 1.778: X1.1 100.62,83.7 100.62,80.95 97.71,78.04 X2.1
+12V2  (via drill 0.4, 0.5, 0.6, 0.85)
  Top 0.406: 173.8,66.55 173.67,66.42 U$54.14 | 173.8,66.55 171.13,66.55 | U$53.12 190.82,54.99 | U$53.14 190.82,52.45 | 190.82,52.45 190.82,49.91 U$53.16 | 173.8,66.55 176.21,66.55 U$54.16 176.21,59.59 178.92,56.88 183.36,56.88 186.42,59.94 v189.22,59.94 190.82,58.34 190.82,57.58 | 171.13,66.55 U$54.12 | U$54.10 168.59,66.55 171.13,66.55 | 190.82,52.45 190.82,54.99 | 190.82,57.58 190.82,54.99 | U$53.10 190.77,57.53 190.82,57.58
  Top 0.61: v214.44,105.66 v211.14,105.66 | BSPD2.9 265.75,86.54 v265.75,101.4 | v258.66,54.97 258.66,51.59 v250.51,43.43 | IC3.1 195.71,9.98 C22.1
  Top 1.27: X21.1 179.21,109.09 182.64,112.52 184.8,112.52 193.13,104.19 v193.13,103.53
  Bottom 0.406: v250.51,43.43 249.24,43.43 BSPD1:D6.C
  Bottom 0.61: v214.44,105.66 224.85,105.66 | 224.85,105.66 224.85,96.15 U$50.1 | X19.1 206.88,91.27 210.17,94.56 210.17,104.7 v211.14,105.66 | 224.85,105.66 249.24,105.66 | X23.9 241.34,122.91 246.42,122.91 249.24,120.09 249.24,105.66 | BSPD2.9 261.68,82.48 261.68,70.23 259.22,67.77 259.22,55.52 v258.66,54.97 | v250.51,43.43 250.51,42.67 248.22,40.39 241.39,40.39 BSPD1:U$26.2 | X20.1 204.03,71.64 204.03,66.8 | 204.03,66.8 205.3,65.53 U$52.4 | 189.22,61.85 v189.22,59.94 | IC3.1 190.21,19.07 190.21,46.63 183.32,53.52 183.32,55.96 189.22,61.85 | v265.75,101.4 261.48,105.66 249.24,105.66 | 189.22,61.85 194.17,66.8 204.03,66.8
  Bottom 1.27: v193.13,103.53 193.13,101.37 206.88,87.62 X19.1
  Bottom 1.778: X19.1 209.79,83.7 209.79,80.95 206.88,78.04 X20.1
BSPD1:N$1  (via drill 0.4)
  Top 0.406: v134.33,38.91 134.33,45.39 124.69,55.03 124.69,57.09 125.7,58.1 v128.64,58.1
  Bottom 0.406: BSPD1:MC34161DG1.3 131.81,59.36 130.56,58.1 v128.64,58.1 | BSPD1:CALIBRATE2.2 148.96,104.39 151.24,104.39 159.63,96.01 159.63,53.9 147.69,41.96 147.69,39.62 146.22,38.15 135.09,38.15 v134.33,38.91
BSPD1:N$2
  Bottom 0.406: BSPD1:MC34161DG1.2 133.08,59.77 134.47,58.38 137.95,58.38 139.18,57.15 144.34,57.15 146.42,59.23 146.42,68.17 139.15,75.44 136.08,75.44 134.23,77.29 134.23,79.55 137.02,82.35 137.02,87.88 137.78,88.65 137.78,101.35 BSPD1:CALIBRATE1.2
BSPD1:N$3  (via drill 0.4)
  Top 0.406: BSPD1:R4.1 150.8,62.74 154.5,62.74 156.65,64.9 156.65,66.83 154.39,69.09 145.99,69.09 140.75,74.32 131.31,74.32 v129.91,72.92
  Bottom 0.406: v129.91,72.92 128.26,71.27 BSPD1:U$5.1
BSPD1:N$4
  Bottom 0.406: BSPD1:R2.1 142.24,59.94 BSPD1:R3.P$1 145.5,60.81 145.5,64.06 144.28,65.28 BSPD1:C1.1 140.83,65.53 134.77,71.59 130.84,71.59 129.38,70.13 129.38,69.19 128.68,68.49 126.31,68.49 126.3,68.48 125.72,69.06 BSPD1:U$5.3 125.72,71.4 123.05,74.07 123.05,76.96 124.07,77.98 125.72,77.98 BSPD1:U$2.3
BSPD1:N$5
  Bottom 0.406: BSPD1:U$5.2 126.99,71.98 131.52,76.52 131.52,90.67 133.06,92.2 134.48,92.2 135.75,93.47 135.75,96.77 132.28,100.24 128.47,100.24 BSPD1:CALIBRATE3.2
BSPD1:N$6  (via drill 0.4)
  Top 0.406: BSPD1:U$3.3 155.56,65.86 153.35,68.07 142.86,68.07 BSPD1:U$4.COIL- 138.32,72.62 133.77,72.62 131.94,70.79 131.94,69.95 131.08,69.09 130.42,69.09 126.84,72.67 v126.84,73.51
  Bottom 0.406: 135.15,88.3 136,87.45 136,82.45 133.46,79.91 133.46,76 135.29,74.17 136.77,74.17 BSPD1:U$4.COIL- | 135.15,88.3 BSPD1:U$4.3 | BSPD1:D1.C 135.29,88.3 135.15,88.3 | BSPD1:U$5.5 124.45,74.24 125.18,73.51 v126.84,73.51
BSPD1:N$7  (via drill 0.4)
  Top 0.406: v127.98,83.49 127.98,80.31 127.44,79.78 127.44,78.74 125.87,77.17 125.87,66.24 131.69,60.43 v131.69,57.89 | v136.69,56.97 136.69,54.08 139.41,51.36 v139.66,51.36
  Bottom 0.406: BSPD1:U$2.5 124.45,84.18 125.13,83.49 v127.98,83.49 | v131.69,57.89 132.6,56.97 v136.69,56.97 | BSPD1:U$10.4 140.03,50.99 v139.66,51.36
BSPD1:N$8  (via drill 0.4)
  Top 0.406: v139.41,58.93 v139.41,53.39
  Bottom 0.406: v139.41,58.93 BSPD1:R2.2 | v139.41,53.39 137.69,53.39 BSPD1:U$9.4
BSPD1:N$9
  Top 0.406: BSPD1:U$3.1 150.6,59.74 BSPD1:R4.2
BSPD1:N$10  (via drill 0.4)
  Top 0.406: BSPD1:LED2.A 123.76,80.66 v123.76,68.48
  Bottom 0.406: BSPD1:U$1.7 BSPD1:U$1.6 124.45,67.79 v123.76,68.48
BSPD1:N$11  (via drill 0.4)
  Top 0.406: v151.5,58.45 149.62,58.45 147.89,60.17 BSPD1:R1.2 145.9,62.23 v143.29,62.23 | v130.54,67.72 132.98,65.28 135.6,65.28 137.2,63.68 139.05,63.68 v140.25,62.48 | v158.2,99.62 158.2,72.69 158.71,72.19 158.71,59.49 156.43,57.2 v156.17,57.2
  Bottom 0.406: BSPD1:U$1.5 123.18,64.62 124.12,63.68 127.42,63.68 127.98,64.24 128.93,64.24 BSPD1:MC34161DG1.5 v130.54,67.72 | BSPD1:U$9.1 139.58,48.94 139.59,48.93 140.92,48.93 141.93,47.92 BSPD1:U$10.1 143.32,47.14 151.5,55.32 v151.5,58.45 152.74,57.2 v156.17,57.2 | v143.29,62.23 140.5,62.23 v140.25,62.48 | BSPD1:U$7.P$1 147.03,112.83 158.2,101.65 v158.2,99.62
BSPD1:N$12  (via drill 0.4)
  Top 0.406: v131.81,67.82 134.94,67.82 136.28,69.16 v136.28,71.7 | v124.24,53.47 123.61,54.1 123.61,57.45 v124.96,58.8 | BSPD1:U$8.P$1 150.08,109.02 152.36,111.3 154.9,111.3 156.17,110.03 156.17,103.94 159.47,100.64 159.47,58.73 156.68,55.93 v155.92,55.93
  Bottom 0.406: v131.81,67.82 BSPD1:MC34161DG1.6 131.81,64.8 130.21,63.2 128.36,63.2 127.69,62.52 124.89,62.52 124.45,62.08 BSPD1:U$1.3 124.45,59.31 v124.96,58.8 | v136.28,71.7 136.28,72.1 BSPD1:R7.2 | v124.24,53.47 133.08,53.47 134.51,52.05 134.51,51.38 135.57,50.32 136.16,50.32 136.89,49.58 BSPD1:U$9.2 136.89,48.13 137.2,47.83 138.85,47.83 139.23,48.21 140.37,48.21 140.98,47.6 BSPD1:U$10.2 140.98,46.48 141.69,45.77 145.76,45.77 v155.92,55.93
BSPD1:N$13  (via drill 0.4)
  Top 0.406: BSPD1:LED1.A 126.53,79.32 124.93,77.72 124.93,68.17 122.69,65.94 122.69,64.95 125.79,61.85 v128.38,61.85
  Bottom 0.406: BSPD1:U$1.2 BSPD1:U$1.1 127.18,60.65 v128.38,61.85
BSPD1:N$14
  Top 0.406: BSPD1:R9.1 BSPD1:LED2.C
BSPD1:N$15
  Top 0.406: BSPD1:R8.1 BSPD1:LED1.C
BSPD1:N$31  (via drill 0.4)
  Top 0.406: v243.5,38.91 243.5,45.39 233.86,55.03 233.86,57.09 234.87,58.1 v237.81,58.1
  Bottom 0.406: BSPD1:MC34161DG2.3 240.98,59.36 239.73,58.1 v237.81,58.1 | BSPD1:CALIBRATE8.2 258.13,104.39 260.41,104.39 268.8,96.01 268.8,53.9 256.86,41.96 256.86,39.62 255.38,38.15 244.26,38.15 v243.5,38.91
BSPD1:N$32
  Bottom 0.406: BSPD1:MC34161DG2.2 242.25,59.77 243.64,58.38 247.12,58.38 248.35,57.15 253.5,57.15 255.59,59.23 255.59,68.17 248.32,75.44 245.25,75.44 243.4,77.29 243.4,79.55 246.19,82.35 246.19,87.88 246.95,88.65 246.95,101.35 BSPD1:CALIBRATE7.2
BSPD1:N$33  (via drill 0.4)
  Top 0.406: BSPD1:R22.1 259.97,62.74 263.66,62.74 265.82,64.9 265.82,66.83 263.56,69.09 255.16,69.09 249.92,74.32 240.47,74.32 v239.08,72.92
  Bottom 0.406: v239.08,72.92 237.43,71.27 BSPD1:U$25.1
BSPD1:N$34
  Bottom 0.406: BSPD1:R20.1 251.41,59.94 BSPD1:R21.P$1 254.67,60.81 254.67,64.06 253.45,65.28 BSPD1:C3.1 250,65.53 243.94,71.59 240,71.59 238.54,70.13 238.54,69.19 237.85,68.49 235.48,68.49 235.47,68.48 234.89,69.06 BSPD1:U$25.3 234.89,71.4 232.22,74.07 232.22,76.96 233.24,77.98 234.89,77.98 BSPD1:U$22.3
BSPD1:N$35
  Bottom 0.406: BSPD1:U$25.2 236.16,71.98 240.69,76.52 240.69,90.67 242.23,92.2 243.65,92.2 244.92,93.47 244.92,96.77 241.45,100.24 237.64,100.24 BSPD1:CALIBRATE9.2
BSPD1:N$36  (via drill 0.4)
  Top 0.406: BSPD1:U$23.3 264.73,65.86 262.52,68.07 252.03,68.07 BSPD1:U$24.COIL- 247.49,72.62 242.94,72.62 241.11,70.79 241.11,69.95 240.25,69.09 239.59,69.09 236,72.67 v236,73.51
  Bottom 0.406: 244.32,88.3 245.17,87.45 245.17,82.45 242.63,79.91 242.63,76 244.46,74.17 245.94,74.17 BSPD1:U$24.COIL- | 244.32,88.3 BSPD1:U$24.3 | BSPD1:D5.C 244.46,88.3 244.32,88.3 | BSPD1:U$25.5 233.62,74.24 234.35,73.51 v236,73.51
BSPD1:N$37  (via drill 0.4)
  Top 0.406: v237.15,83.49 237.15,80.31 236.61,79.78 236.61,78.74 235.04,77.17 235.04,66.24 240.86,60.43 v240.86,57.89 | v245.86,56.97 245.86,54.08 248.58,51.36 v248.83,51.36
  Bottom 0.406: BSPD1:U$22.5 233.62,84.18 234.3,83.49 v237.15,83.49 | v240.86,57.89 241.77,56.97 v245.86,56.97 | BSPD1:U$30.4 249.2,50.99 v248.83,51.36
BSPD1:N$38  (via drill 0.4)
  Top 0.406: v248.58,58.93 v248.58,53.39
  Bottom 0.406: v248.58,58.93 BSPD1:R20.2 | v248.58,53.39 246.86,53.39 BSPD1:U$29.4
BSPD1:N$39
  Top 0.406: BSPD1:U$23.1 259.77,59.74 BSPD1:R22.2
BSPD1:N$40  (via drill 0.4)
  Top 0.406: BSPD1:LED6.A 232.93,80.66 v232.93,68.48
  Bottom 0.406: BSPD1:U$21.7 BSPD1:U$21.6 233.62,67.79 v232.93,68.48
BSPD1:N$41  (via drill 0.4)
  Top 0.406: v260.67,58.45 258.79,58.45 257.06,60.17 BSPD1:R19.2 255.07,62.23 v252.46,62.23 | v239.71,67.72 242.15,65.28 244.77,65.28 246.37,63.68 248.22,63.68 v249.42,62.48 | v267.37,99.62 267.37,72.69 267.88,72.19 267.88,59.49 265.6,57.2 v265.34,57.2
  Bottom 0.406: BSPD1:U$21.5 232.35,64.62 233.29,63.68 236.59,63.68 237.15,64.24 238.1,64.24 BSPD1:MC34161DG2.5 v239.71,67.72 | BSPD1:U$29.1 248.75,48.94 248.76,48.93 250.09,48.93 251.1,47.92 BSPD1:U$30.1 252.49,47.14 260.67,55.32 v260.67,58.45 261.91,57.2 v265.34,57.2 | v252.46,62.23 249.67,62.23 v249.42,62.48 | BSPD1:U$27.P$1 256.2,112.83 267.37,101.65 v267.37,99.62
BSPD1:N$42  (via drill 0.4)
  Top 0.406: v240.98,67.82 244.11,67.82 245.45,69.16 v245.45,71.7 | v233.41,53.47 232.78,54.1 232.78,57.45 v234.12,58.8 | BSPD1:U$28.P$1 259.25,109.02 261.53,111.3 264.07,111.3 265.34,110.03 265.34,103.94 268.64,100.64 268.64,58.73 265.85,55.93 v265.09,55.93
  Bottom 0.406: v240.98,67.82 BSPD1:MC34161DG2.6 240.98,64.8 239.38,63.2 237.53,63.2 236.86,62.52 234.06,62.52 233.62,62.08 BSPD1:U$21.3 233.62,59.31 v234.12,58.8 | v245.45,71.7 245.45,72.1 BSPD1:R25.2 | v233.41,53.47 242.25,53.47 243.68,52.05 243.68,51.38 244.74,50.32 245.33,50.32 246.06,49.58 BSPD1:U$29.2 246.06,48.13 246.37,47.83 248.02,47.83 248.4,48.21 249.54,48.21 250.15,47.6 BSPD1:U$30.2 250.15,46.48 250.86,45.77 254.93,45.77 v265.09,55.93
BSPD1:N$43  (via drill 0.4)
  Top 0.406: BSPD1:LED5.A 235.7,79.32 234.1,77.72 234.1,68.17 231.86,65.94 231.86,64.95 234.96,61.85 v237.55,61.85
  Bottom 0.406: BSPD1:U$21.2 BSPD1:U$21.1 236.35,60.65 v237.55,61.85
BSPD1:N$44
  Top 0.406: BSPD1:R27.1 BSPD1:LED6.C
BSPD1:N$45
  Top 0.406: BSPD1:R26.1 BSPD1:LED5.C
BSPD1:SHUTDOWN_C1
  Bottom 1.778: BSPD1:U$4.6 142.43,89.74 146.16,93.47 154.8,93.47 157.85,90.42 157.85,55.04 143.75,40.95 BSPD1:U$6.S
BSPD1:SHUTDOWN_C2
  Bottom 1.778: BSPD1:U$24.6 251.6,89.74 255.33,93.47 263.97,93.47 267.02,90.42 267.02,55.04 252.92,40.95 BSPD1:U$26.S
BUT1  (via drill 0.4)
  Top 0.406: v58.51,128.96 v58.51,100.38
  Bottom 0.406: PI_ODD1.2 58.51,82.6 v58.51,100.38 | BUTTON1.3 87.74,129.87 84.8,126.92 78.96,126.92 74.64,131.24 66.38,131.24 64.1,128.96 v58.51,128.96
BUT2  (via drill 0.4)
  Top 0.406: v167.68,128.96 v167.68,100.38
  Bottom 0.406: PI_ODD2.2 167.68,82.6 v167.68,100.38 | BUTTON2.3 196.91,129.87 193.97,126.92 188.13,126.92 183.81,131.24 175.55,131.24 173.27,128.96 v167.68,128.96
CAN-H1  (via drill 0.4)
  Top 0.406: U$10.7 70.6,115.82 v70.73,115.82 | v77.33,113.28 77.48,113.13 92.14,113.13 v92.98,112.29 | v101.79,113.28 101.78,113.3 R22.2
  Bottom 0.406: v77.33,113.28 74.79,115.82 v70.73,115.82 | v92.98,112.29 93.97,113.28 v101.79,113.28
CAN-H2  (via drill 0.4)
  Top 0.406: U$58.7 179.77,115.82 v179.9,115.82 | v186.5,113.28 186.65,113.13 201.31,113.13 v202.15,112.29 | v210.96,113.28 210.95,113.3 R110.2
  Bottom 0.406: v186.5,113.28 183.96,115.82 v179.9,115.82 | v202.15,112.29 203.14,113.28 v210.96,113.28
CAN-L1  (via drill 0.4)
  Top 0.406: U$10.6 69.33,112.57 68.82,112.06 65.62,112.06 v64.73,112.95 | v101.82,125.02 101.82,116.88 R23.2
  Bottom 0.406: v101.82,125.02 98.82,128.02 89.12,128.02 87.26,126.16 78.5,126.16 74.13,130.53 68.44,130.53 63.84,125.93 63.84,113.84 v64.73,112.95
CAN-L2  (via drill 0.4)
  Top 0.406: U$58.6 178.5,112.57 177.99,112.06 174.79,112.06 v173.9,112.95 | v210.99,125.02 210.99,116.88 R111.2
  Bottom 0.406: v210.99,125.02 207.99,128.02 198.29,128.02 196.43,126.16 187.67,126.16 183.3,130.53 177.61,130.53 173.01,125.93 173.01,113.84 v173.9,112.95
CANH
  Top 0.61: BMS1.6 12.21,13.91 arc90 11.89,14.22 4.91,14.22 4.9,6.38 8.31,2.96 40.22,2.96 40.22,10.69 44.96,10.69 44.96,13 X7.4